# EAGLE board stepper-single (EAGLE 4.16)
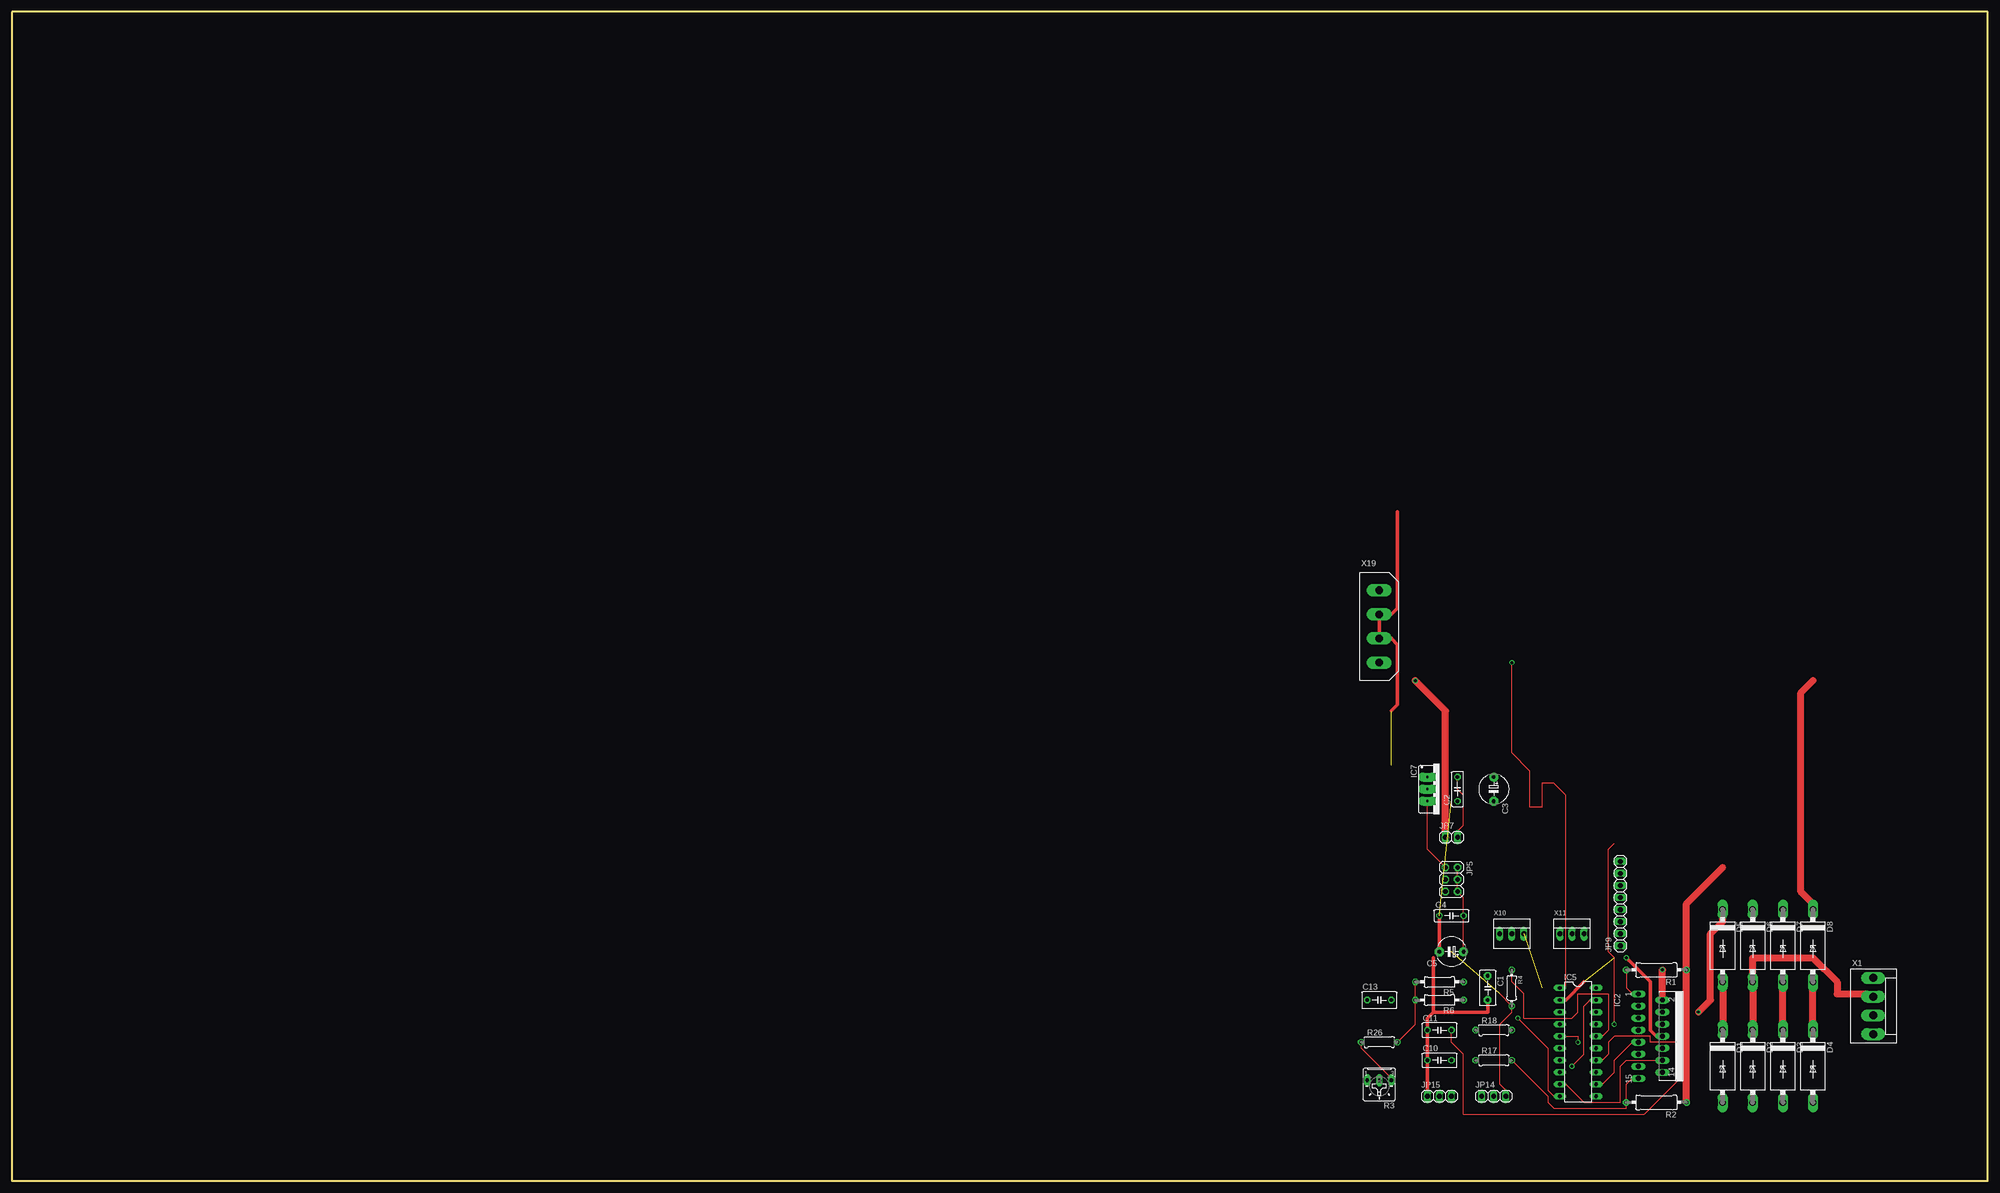
[diagram p0: board, top side]
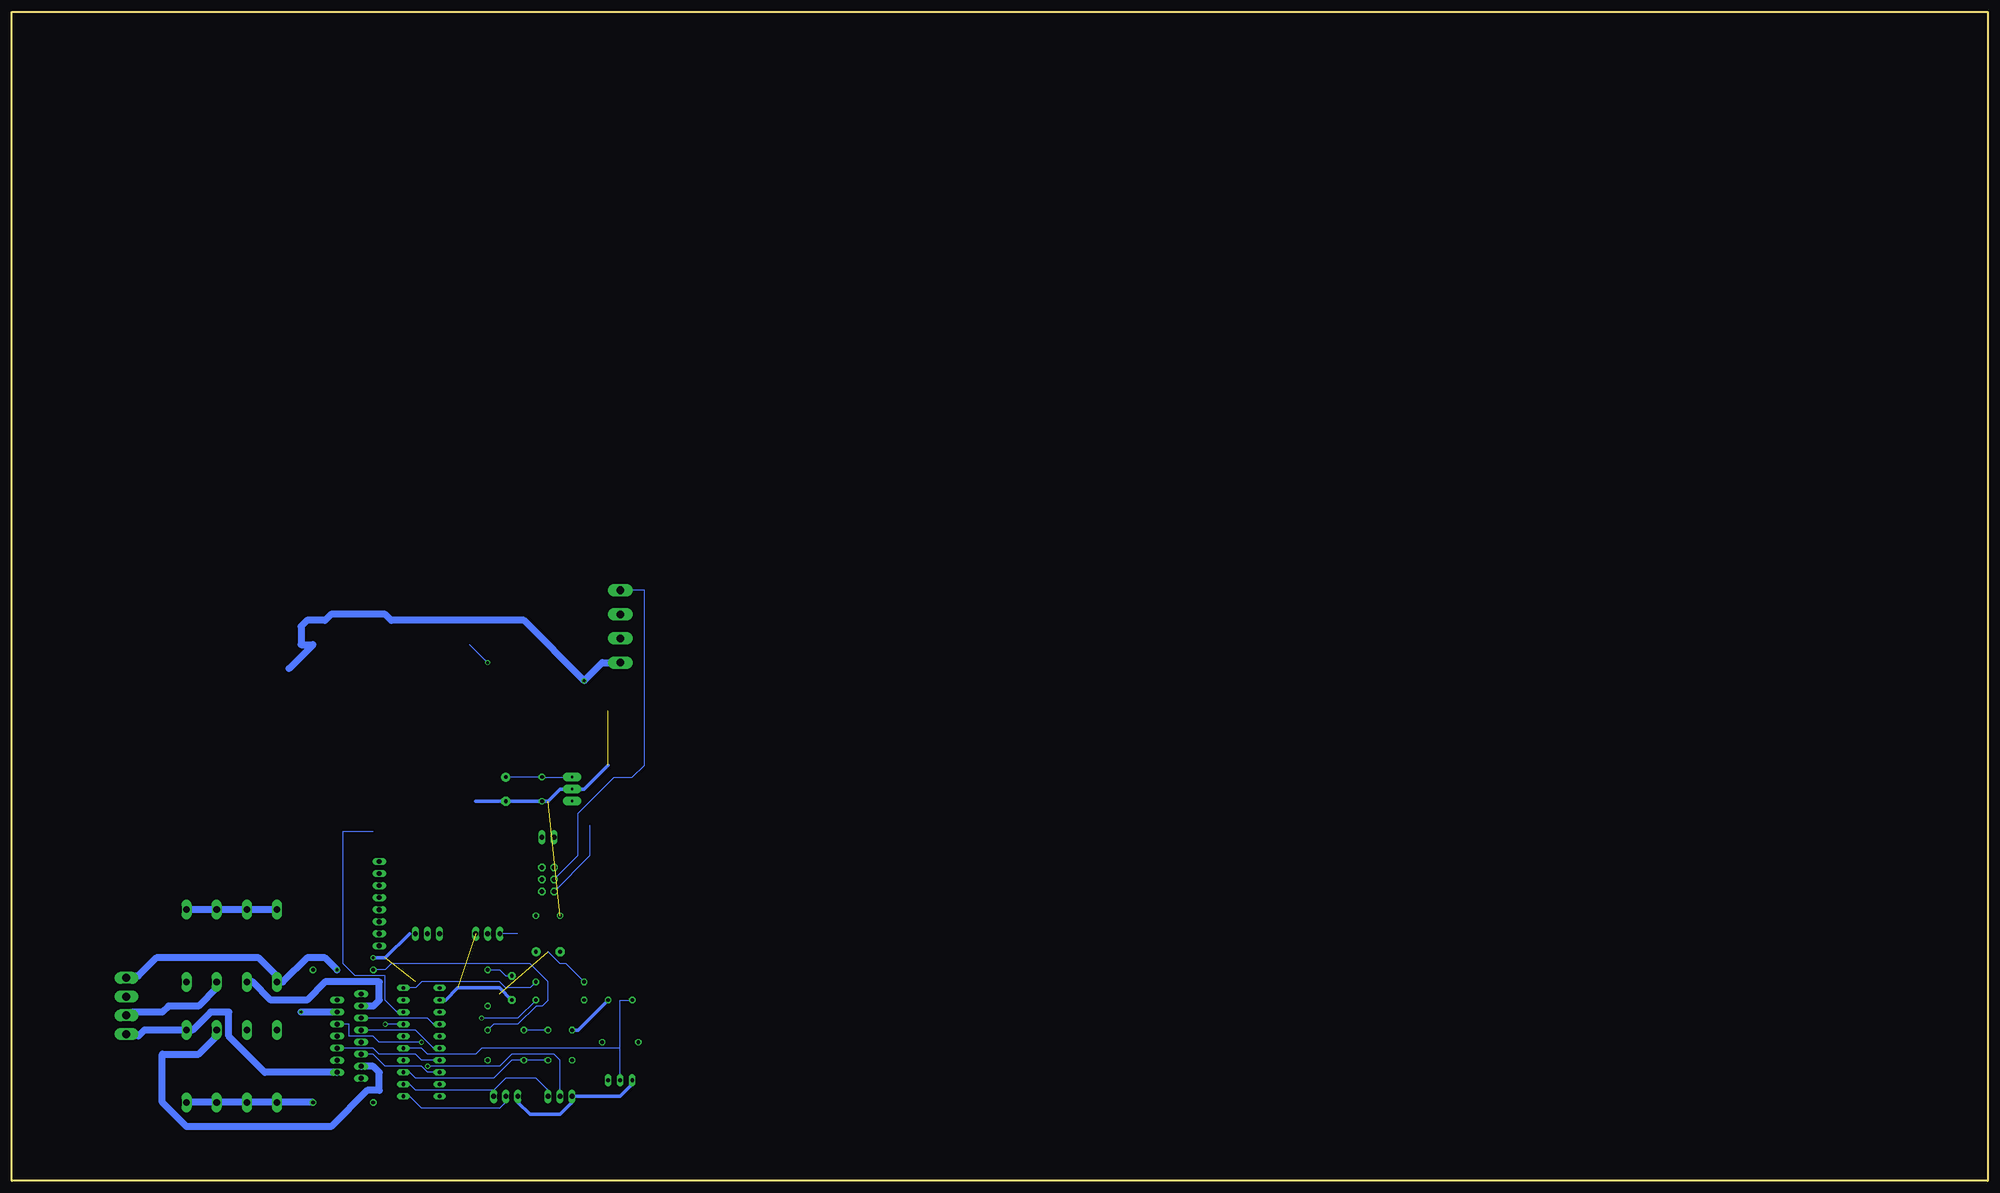
[diagram p1: board, bottom side, seen from below]

Size 416.56 x 246.38 mm. Coordinates in mm from the lower left corner, seen from the top.
Outline: 0,246.38 0,0 416.56,0 416.56,246.38 0,246.38
Copper layers (1*16): Top 0.035mm / dielectric 1.5mm / Bottom 0.035mm
Design rules "default": minimum track width 10mil, minimum drill 24mil, track to track 8mil, track to pad 8mil, pad to pad 8mil, via to via 8mil, smd to smd 8mil, copper to edge 40mil, drill to drill 8mil, minimum pad ring 10mil, minimum via ring 8mil, stop-mask expansion 4mil, vias tented up to drill 0mil, thermal gap 10mil
Net classes: 1 Power: width 1.524 mm, drill 0.381 mm; 2 Signal: width 0.508 mm, drill 0.381 mm; 3 Ground: width 0.762 mm, drill 0.381 mm

## Footprints (pad centres in the part's own frame; a part is rotated, then mirrored left to right if it is on the bottom)
C5B3.5 = drill 0.813 pad 1.6 octagon: 1 -2.54,0; 2 2.54,0
C050-025X075 = drill 0.813 octagon: 1 -2.54,0; 2 2.54,0
E5-6 = drill 0.813 pad 1.905 round: + -2.54,0 | drill 0.813 pad 1.905 octagon: - 2.54,0
C050-030X075 = drill 0.813 octagon: 1 -2.54,0; 2 2.54,0
C050-035X075 = drill 0.813 octagon: 1 -2.54,0; 2 2.54,0
CB429-15 = drill 1.397 long: A 7.62,0; C -7.62,0
MULTIWATT-15 = drill 1.016 long: 1 -8.89,-7.62; 2 -7.62,-2.54; 3 -6.35,-7.62; 4 -5.08,-2.54; 5 -3.81,-7.62; 6 -2.54,-2.54; 7 -1.27,-7.62; 8 0,-2.54; 9 1.27,-7.62; 10 2.54,-2.54; 11 3.81,-7.62; 12 5.08,-2.54; 13 6.35,-7.62; 14 7.62,-2.54; 15 8.89,-7.62
DIL20 = drill 0.813 long: 1 -11.43,-3.81; 2 -8.89,-3.81; 3 -6.35,-3.81; 4 -3.81,-3.81; 5 -1.27,-3.81; 6 1.27,-3.81; 7 3.81,-3.81; 8 6.35,-3.81; 9 8.89,-3.81; 10 11.43,-3.81; 11 11.43,3.81; 12 8.89,3.81; 13 6.35,3.81; 14 3.81,3.81; 15 1.27,3.81; 16 -1.27,3.81; 17 -3.81,3.81; 18 -6.35,3.81; 19 -8.89,3.81; 20 -11.43,3.81
78XXS = drill 0.5 pad 1.93 long: GND 0,-2.54; IN -2.54,-2.54; OUT 2.54,-2.54
2X03 = drill 1.016 octagon: 1 -2.54,-1.27; 2 -2.54,1.27; 3 0,-1.27; 4 0,1.27; 5 2.54,-1.27; 6 2.54,1.27
1X02 = drill 1.016 long: 1 -1.27,0; 2 1.27,0
1X08 = drill 1.016 long: 1 -8.89,0; 2 -6.35,0; 3 -3.81,0; 4 -1.27,0; 5 1.27,0; 6 3.81,0; 7 6.35,0; 8 8.89,0
1X03 = drill 1.016 long: 1 -2.54,0; 2 0,0; 3 2.54,0
0309/12 = drill 0.813 octagon: 1 -6.35,0; 2 6.35,0
B25U = drill 0.813 long: A 2.54,-0.889; E -2.54,-0.889; S 0,-0.889
0204/7 = drill 0.813 octagon: 1 -3.81,0; 2 3.81,0
0207/10 = drill 0.813 octagon: 1 -5.08,0; 2 5.08,0
0207/7 = drill 0.813 octagon: 1 -3.81,0; 2 3.81,0
KK-156-4 = drill 1.7 pad 2.184 long: 1 -5.94,0; 2 -1.98,0; 3 1.98,0; 4 5.94,0
22-23-2031 = drill 1 long: 1 -2.54,0; 2 0,0; 3 2.54,0
9090-4V = drill 1.6 pad 2.6 long: 1 -7.62,0; 2 -2.54,0; 3 2.54,0; 4 7.62,0

## Placement (x,y rotation side)
C1  3.3 nF  [C5B3.5]  311.15,40.64 270 top
C2  100nf  [C050-025X075]  304.8,82.55 90 top
C3  100uF  [E5-6]  312.42,82.55 270 top
C4  100nf  [C050-025X075]  303.53,55.88 0 top
C5  100uF  [E5-6]  303.53,48.26 180 top
C10  1n  [C050-030X075]  300.99,25.4 0 top
C11  1n  [C050-030X075]  300.99,31.75 0 top
C13  100nf  [C050-035X075]  288.29,38.1 0 top
D1  UF5404  [CB429-15]  360.68,24.13 270 top
D2  UF5404  [CB429-15]  367.03,24.13 270 top
D3  UF5404  [CB429-15]  373.38,24.13 270 top
D4  UF5404  [CB429-15]  379.73,24.13 270 top
D5  UF5404  [CB429-15]  360.68,49.53 270 top
D6  UF5404  [CB429-15]  367.03,49.53 270 top
D7  UF5404  [CB429-15]  373.38,49.53 270 top
D8  UF5404  [CB429-15]  379.73,49.53 270 top
IC2  L298  [MULTIWATT-15]  350.52,30.48 270 top
IC5  L297  [DIL20]  330.2,29.21 270 top
IC7  7805  [78XXS]  300.99,82.55 270 top
JP5  Vcc Select  [2X03]  303.53,63.5 270 top
JP7  12v Enable  [1X02]  303.53,72.39 0 top
JP9  Arduino 0-7  [1X08]  339.09,58.42 90 top
JP14  X Control  [1X03]  312.42,17.78 0 top
JP15  X Half/Full  [1X03]  300.99,17.78 0 top
R1  0.5  [0309/12]  346.71,44.45 180 top
R2  0.5  [0309/12]  346.71,16.51 180 top
R3  2K  [B25U]  288.29,20.32 180 top
R4  22K  [0204/7]  316.23,40.64 270 top
R5  10K  [0207/10]  300.99,41.91 180 top
R6  10K  [0207/10]  300.99,38.1 180 top
R17  4K7  [0207/7]  312.42,25.4 0 top
R18  4K7  [0207/7]  312.42,31.75 0 top
R26  2K7  [0207/7]  288.29,29.21 0 top
X1  [KK-156-4]  392.43,36.83 270 top
X10  X Min  [22-23-2031]  316.23,52.07 0 top
X11  X Max  [22-23-2031]  328.93,52.07 0 top
X19  9090-4V  [9090-4V]  288.29,116.84 270 top

## Library data of the parts
C1 = capacitor-wima
C2-C5 C10 C11 C13 R1 R2 R4-R6 R17 R18 R26 = rcl
D1-D8 = diode
IC2 IC5 = st-microelectronics
IC7 = cls
JP5 JP7 JP9 JP14 JP15 = pinhead
R3 = pot
X1 X10 X11 = con-molex
X19 = con-thomas-betts

## Nets
GND [Ground]: C1.2 C10.1 C11.1 C13.2 IC2.8 IC5.2 JP14.1 JP15.1 R3.A X10.3
GND1 [Power]: D1.A D2.A D3.A D4.A R1.1 R2.1
N$1: IC2.11 IC5.8
N$2: IC2.6 IC5.5
N$3: IC2.12 IC5.9
N$4: IC2.10 IC5.7
N$5: IC2.7 IC5.6
N$6: IC2.5 IC5.4
N$7: C1.1 IC5.16 R4.1
N$8: C11.2 IC5.14 R18.1
N$9: IC2.15 R2.2 R17.2
N$10: IC5.17
N$11: IC5.18
N$12: IC2.1 R1.2 R18.2
N$13 [Power]: D4.C D8.A IC2.14 X1.4
N$14: IC5.10 R6.1
N$15: IC5.20 R5.1
N$16: C4.2 C5.+ JP5.2 JP5.4 JP5.6
N$17 [Ground]: C2.1 C3.- C4.1 C5.- IC7.GND X19.2 X19.3
N$18: IC5.19 JP15.2
N$19: JP9.1
N$20 [Power]: D3.C D7.A IC2.13 X1.3
N$21: R3.E R26.1
N$22 [Power]: D2.C D6.A IC2.3 X1.2
N$23: JP9.2
N$24: X10.1
N$57: JP5.3 X19.1
N$58: IC7.OUT JP5.1
N$75 [Power]: D1.C D5.A IC2.2 X1.1
N$76: C10.2 IC5.13 R17.1
N$77: C13.1 IC5.15 R3.S
N$78: IC5.11 JP14.2
N$79: C2.2 C3.+ IC7.IN JP7.2
N$88: JP5.5
N$95: IC5.3
N$103: IC5.1
N$109 [Power]: JP7.1 X19.4
VCC: IC2.9 IC5.12 JP14.3 JP15.3 R4.2 R5.2 R6.2 R26.2
VSS [Power]: D5.C D6.C D7.C D8.C IC2.4

## Tracks (layer width: path | path; a pad name or v marks a point on that pad's centre or on a via)
GND  (via drill 0.61)  (2 unrouted)
  Top 0.762: JP15.1 C10.1 C11.1 298.45,34.29 299.72,35.56 | 299.72,35.56 299.72,46.99 | 331.47,41.91 327.66,38.1 IC5.2 | v340.36,46.99 345.44,41.91 345.44,31.75 346.71,30.48 IC2.8 | 299.72,35.56 311.15,35.56 C1.2
  Bottom 0.762: C13.2 297.18,31.75 C11.1 | R3.A 285.75,20.32 288.29,17.78 JP15.1 298.45,16.51 300.99,13.97 307.34,13.97 309.88,16.51 JP14.1 | v340.36,46.99 337.82,46.99 332.74,52.07 | C1.2 313.69,40.64 322.58,40.64 325.12,38.1 IC5.2
GND1
  Top 1.524: R2.1 R1.1 353.06,58.42 360.68,66.04
  Bottom 1.524: R2.1 D1.A D2.A D3.A D4.A
N$1
  Bottom 0.254: IC5.8 328.93,22.86 330.2,24.13 337.82,24.13 340.36,26.67 IC2.11
N$2  (via drill 0.61)
  Top 0.254: v330.2,29.21 330.2,30.48 IC5.5
  Bottom 0.254: v330.2,29.21 339.09,29.21 340.36,30.48 345.44,30.48 345.44,33.02 IC2.6
N$3
  Top 0.254: IC5.9 327.66,20.32 331.47,16.51 339.09,16.51 339.09,24.13 340.36,25.4 IC2.12
N$4
  Bottom 0.254: IC5.7 330.2,25.4 331.47,26.67 339.09,26.67 340.36,27.94 IC2.10
N$5
  Bottom 0.254: IC5.6 327.66,27.94 331.47,31.75 IC2.7
N$6
  Bottom 0.254: IC5.4 327.66,33.02 328.93,34.29 IC2.5
N$7
  Top 0.254: R4.1 316.23,41.91 318.77,39.37 318.77,34.29 328.93,34.29 330.2,35.56 330.2,39.37 336.55,39.37 336.55,31.75 335.28,30.48 IC5.16
  Bottom 0.254: R4.1 313.69,44.45 312.42,43.18 C1.1
N$8
  Top 0.254: C11.2 303.53,29.21 306.07,26.67 306.07,13.97 344.17,13.97 351.79,21.59 351.79,29.21 345.44,29.21 345.44,30.48 337.82,30.48 336.55,29.21 336.55,26.67 335.28,25.4 IC5.14
  Bottom 0.254: C11.2 R18.1
N$9
  Top 0.254: R17.2 323.85,17.78 323.85,16.51 325.12,15.24 340.36,15.24 R2.2 340.36,20.32 341.63,21.59 IC2.15
N$10  (via drill 0.61)
  Top 0.254: v337.82,33.02 337.82,46.99 336.55,48.26 336.55,69.85 337.82,71.12
  Bottom 0.254: IC5.17 v337.82,33.02
N$11
  Bottom 0.254: 340.36,73.66 346.71,73.66 346.71,45.72 344.17,43.18 337.82,43.18 337.82,38.1 335.28,35.56 IC5.18
N$12
  Top 0.254: R1.2 340.36,40.64 341.63,39.37 IC2.1
  Bottom 0.254: R18.2 314.96,33.02 309.88,33.02 306.07,36.83 304.8,36.83 303.53,38.1 303.53,41.91 307.34,45.72 336.55,45.72 337.82,44.45 R1.2
N$13
  Top 1.524: D4.C D8.A
  Bottom 1.524: IC2.14 363.22,22.86 370.84,30.48 370.84,35.56 374.65,35.56 378.46,31.75 D4.C 388.62,31.75 389.89,30.48 X1.4
N$14  (via drill 0.61)
  Top 0.254: v317.5,34.29 323.85,27.94 323.85,19.05 325.12,17.78 IC5.10
  Bottom 0.254: R6.1 309.88,34.29 v317.5,34.29
N$15
  Bottom 0.254: R5.1 307.34,40.64 312.42,40.64 313.69,41.91 330.2,41.91 331.47,40.64 IC5.20
N$16
  Top 0.254: JP5.2 JP5.4 JP5.6 306.07,59.69 C4.2 C5.+
N$17  (2 unrouted)
  Top 0.762: 290.83,99.06 292.1,100.33 292.1,113.03 290.83,114.3 X19.3 X19.2 290.83,119.38 292.1,120.65 292.1,140.97 | C5.- C4.1
  Bottom 0.762: 290.83,87.63 295.91,82.55 IC7.GND 300.99,82.55 303.53,80.01 C2.1 C3.- 318.77,80.01
N$18  (via drill 0.61)
  Top 0.254: v328.93,24.13 331.47,26.67 331.47,36.83 332.74,38.1 IC5.19
  Bottom 0.254: v328.93,24.13 313.69,24.13 311.15,26.67 302.26,26.67 300.99,25.4 JP15.2
N$20
  Top 1.524: D3.C D7.A
  Bottom 1.524: IC2.13 340.36,24.13 339.09,22.86 339.09,19.05 341.63,19.05 349.25,11.43 379.73,11.43 384.81,16.51 384.81,26.67 377.19,26.67 373.38,30.48 D3.C | X1.3 391.16,35.56 384.81,35.56 383.54,36.83 377.19,36.83 373.38,40.64 D7.A
N$21
  Top 0.254: R26.1 284.48,27.94 290.83,21.59 R3.E
N$22
  Top 1.524: D2.C D6.A 367.03,46.99 379.73,46.99 384.81,41.91 384.81,39.37 391.16,39.37 X1.2
  Bottom 1.524: D6.A 365.76,41.91 361.95,38.1 354.33,38.1 350.52,41.91 339.09,41.91 339.09,38.1 340.36,36.83 IC2.3
N$24
  Bottom 0.254: 309.88,52.07 X10.1
N$57
  Bottom 0.254: JP5.3 297.18,68.58 297.18,77.47 289.56,85.09 285.75,85.09 283.21,87.63 283.21,124.46 X19.1
N$58
  Top 0.254: JP5.1 298.45,69.85 IC7.OUT
N$75  (via drill 0.61)
  Top 1.524: IC2.2 v347.98,44.45 | D5.A D1.C
  Bottom 1.524: v347.98,44.45 350.52,46.99 354.33,46.99 359.41,41.91 D5.A 360.68,43.18 364.49,46.99 386.08,46.99 389.89,43.18 X1.1
N$76
  Bottom 0.254: C10.2 R17.1 311.15,25.4 314.96,21.59 331.47,21.59 332.74,22.86 IC5.13
N$77
  Bottom 0.254: 288.29,27.94 288.29,38.1 C13.1 | R3.S 288.29,27.94 | 288.29,27.94 317.5,27.94 318.77,26.67 328.93,26.67 330.2,27.94 IC5.15
N$78
  Bottom 0.254: IC5.11 332.74,17.78 330.2,15.24 313.69,15.24 312.42,16.51 JP14.2
N$79
  Top 0.254: C2.2 304.8,82.55 306.07,81.28 306.07,74.93 304.8,73.66 JP7.2
  Bottom 0.254: C3.+ C2.2 IC7.IN
N$88
  Bottom 0.254: JP5.5 294.64,68.58 294.64,74.93
N$103  (via drill 0.61)
  Top 0.254: v316.23,109.22 316.23,90.17 320.04,86.36 320.04,78.74 322.58,78.74 322.58,83.82 325.12,83.82 327.66,81.28 327.66,40.64 IC5.1
  Bottom 0.254: v316.23,109.22 320.04,113.03
N$109  (via drill 0.61)
  Top 1.524: v295.91,105.41 302.26,99.06 JP7.1
  Bottom 1.524: X19.4 292.1,109.22 v295.91,105.41 308.61,118.11 336.55,118.11 337.82,119.38 349.25,119.38 350.52,118.11 354.33,118.11 355.6,116.84 355.6,113.03 353.06,113.03 358.14,107.95
VCC  (1 unrouted)
  Top 0.254: R26.2 295.91,33.02 R6.2 R5.2 | IC5.12 335.28,20.32 337.82,22.86 337.82,25.4 341.63,29.21 IC2.9 | 313.69,39.37 R4.2 316.23,35.56 313.69,33.02 313.69,20.32 314.96,19.05 JP14.3
  Bottom 0.254: R5.2 299.72,45.72 300.99,45.72 303.53,48.26 | 314.96,19.05 312.42,21.59 306.07,21.59 303.53,19.05 JP15.3 | 314.96,19.05 331.47,19.05 332.74,20.32 IC5.12 | 314.96,19.05 JP14.3
VSS  (via drill 0.61)
  Top 1.524: v355.6,35.56 358.14,38.1 358.14,52.07 360.68,54.61 D5.C | 379.73,105.41 377.19,102.87 377.19,60.96 379.73,58.42 D8.C
  Bottom 1.524: IC2.4 v355.6,35.56 | D5.C D6.C D7.C D8.C